# EAGLE board 0HP Vactrol LPG-VCA REV 1 (EAGLE 7.6.0)
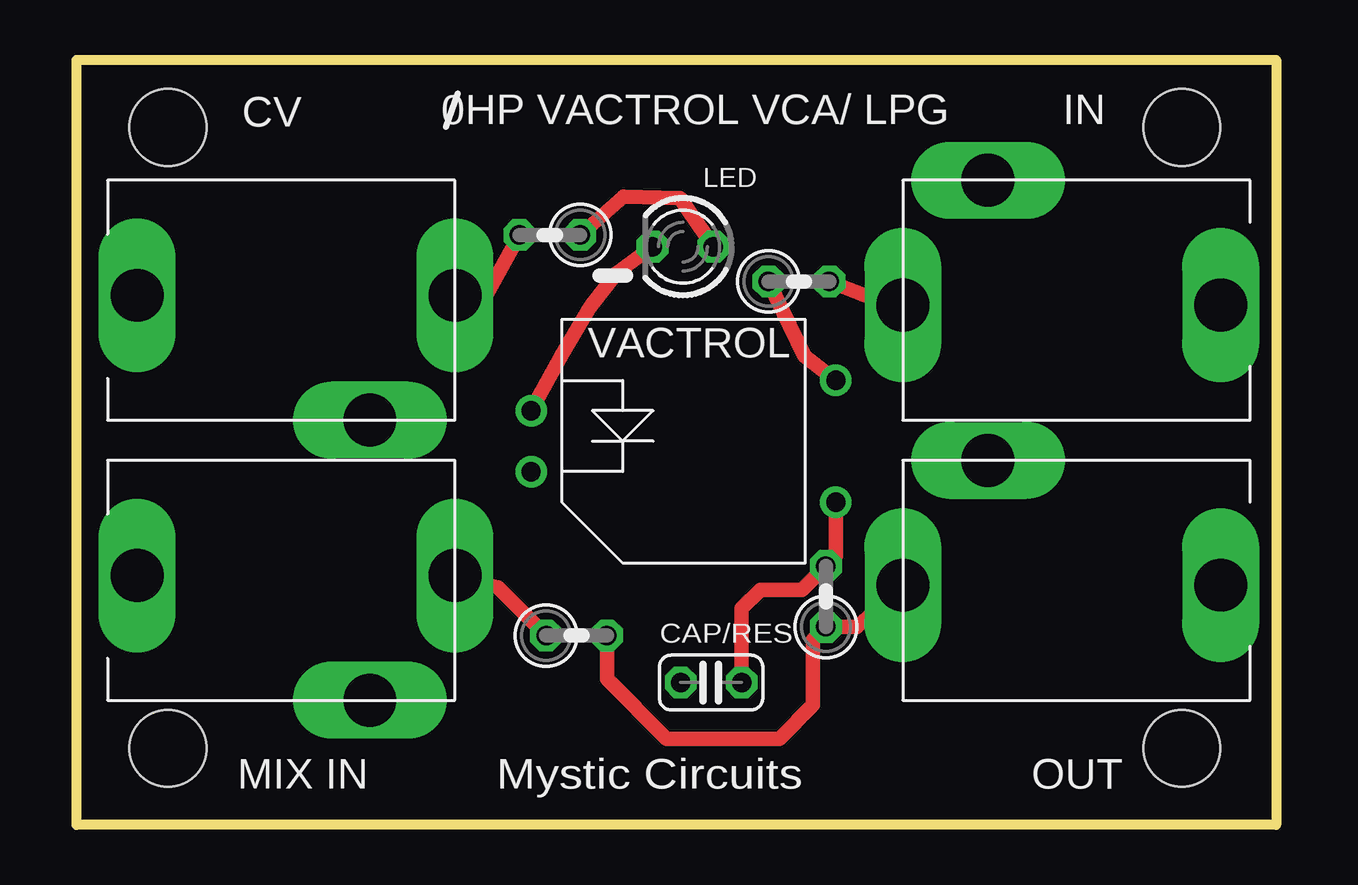
[diagram p0: board, top side]
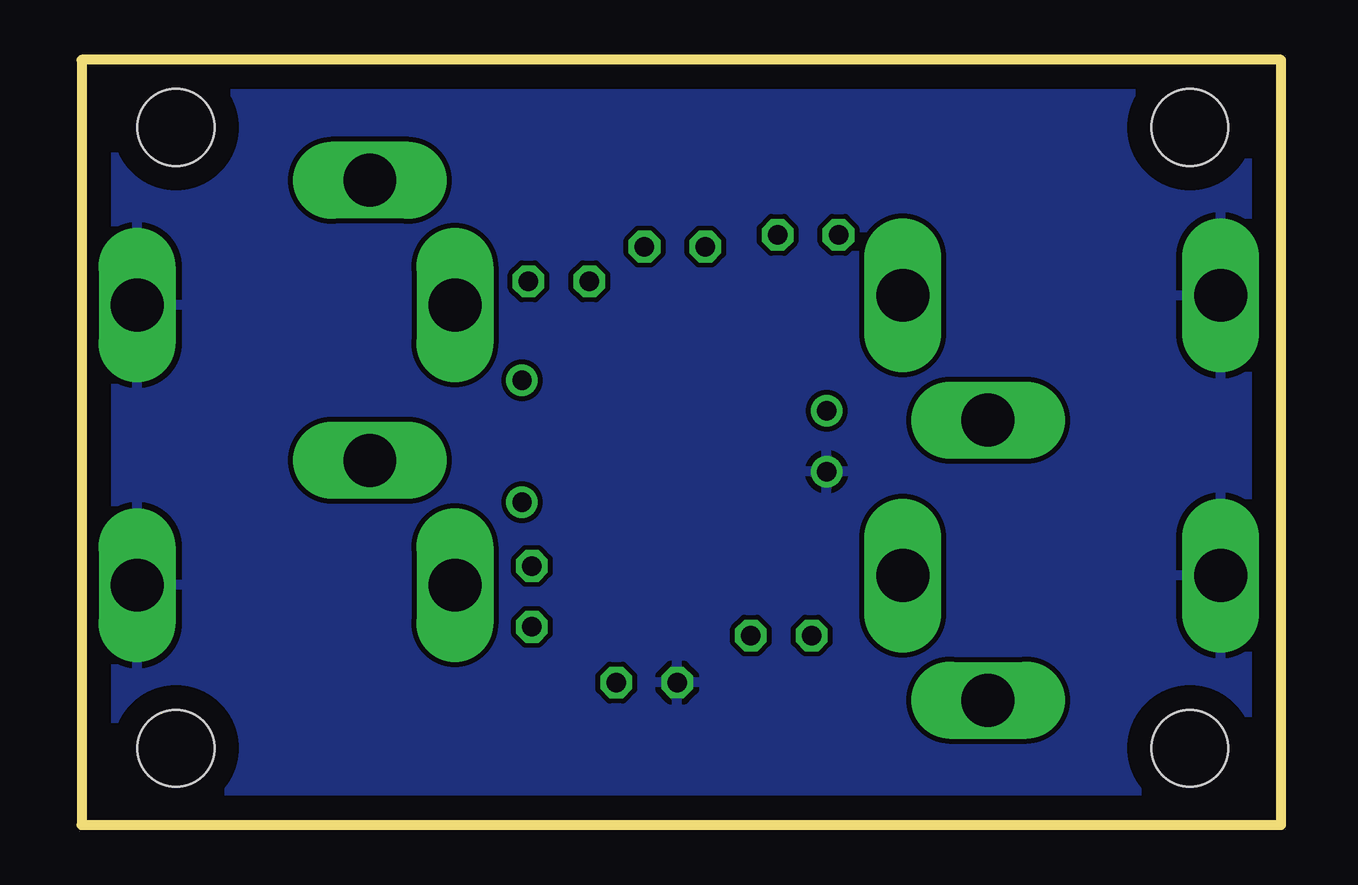
[diagram p1: board, bottom side, seen from below]

Size 50 x 31.89 mm. Coordinates in mm from the lower left corner, seen from the top.
Outline: 0,0 0,31.89 50,31.89 50,0 0,0
Copper layers (1*16): Top 0.035mm / dielectric 1.5mm / Bottom 0.035mm
Design rules "default": minimum track width 10mil, minimum drill 24mil, track to track 8mil, track to pad 8mil, pad to pad 8mil, via to via 8mil, smd to smd 8mil, copper to edge 40mil, drill to drill 8mil, minimum pad ring 10mil, minimum via ring 8mil, stop-mask expansion 4mil, vias tented up to drill 0mil, thermal gap 10mil
Holes 3.2 mm at 3.81,3.2 46.08,3.2 46.08,29.08 3.81,29.08

## Footprints (pad centres in the part's own frame; a part is rotated, then mirrored left to right if it is on the bottom)
C025-024X044 = drill 0.813 octagon: 1 -1.27,0; 2 1.27,0
3.5MMPHONEJACK = drill 2.2 pad 2.54 long: SLEEVE -5,0.2; SWITCH 4.7,-5; TIP 8.25,0.2
LED3MM = drill 0.813 octagon: A -1.27,0; K 1.27,0
0207/2V = drill 0.813 octagon: 1 -1.27,0; 2 1.27,0
VACTROL = drill 0.8: ANODE -6.35,1.27; BOTTOM 6.35,-2.54; CATHODE -6.35,-1.27; TOP 6.35,2.54

## Placement (x,y rotation side)
C1  10nF  [C025-024X044]  26.45,5.94 180 top
CV1  3.5MMJACK  [3.5MMPHONEJACK]  7.53,10.2 0 top
CV2  3.5MMJACK  [3.5MMPHONEJACK]  7.53,21.88 0 top
D1  [LED3MM]  25.27,24.11 180 top
IN  3.5MMJACK  [3.5MMPHONEJACK]  42.69,10.2 180 top
OUT  3.5MMJACK  [3.5MMPHONEJACK]  42.69,21.88 180 top
R1  1k  [0207/2V]  19.73,24.6 180 top
R2  10k  [0207/2V]  20.84,7.9 0 top
R3  1k  [0207/2V]  30.11,22.66 0 top
R5  1k  [0207/2V]  31.23,9.53 90 top
U$1  VACTROL  [VACTROL]  25.3,16 0 top

## Library data of the parts
C1 = rcl
CV1 CV2 IN OUT U$1 = elipech_modified
D1 = led
R1-R3 R5 = resistor

## Nets
GND: C1.2 CV1.SLEEVE CV2.SLEEVE IN.SLEEVE OUT.SLEEVE U$1.CATHODE
N$1: CV2.TIP R1.2
N$2: D1.A R1.1
N$3: CV1.TIP R2.1
N$4: C1.1 R5.2 U$1.BOTTOM
N$5: D1.K U$1.ANODE
N$7: R3.1 U$1.TOP
N$8: IN.TIP R2.2 R5.1
N$11: OUT.TIP R3.2

## Tracks (layer width: path | path; a pad name or v marks a point on that pad's centre or on a via)
GND
  pour Bottom: 0,0 0,31.62 50,31.62 50,0
N$1
  Top 0.61: CV2.TIP 16.98,21.93 R1.2
N$2
  Top 0.61: R1.1 22.8,26.2 25.16,26.14 D1.A
N$3
  Top 0.61: CV1.TIP 17.57,9.9 R2.1
N$4
  Top 0.61: U$1.BOTTOM 31.65,11.21 R5.2 30.23,9.8 28.5,9.8 27.72,9.02 C1.1
N$5
  Top 0.61: U$1.ANODE 20.25,19.65 21.4,21.6 22.52,23 D1.K
N$7
  Top 0.61: R3.1 30.34,19.55 U$1.TOP
N$8
  Top 0.61: IN.TIP 32.52,8.26 R5.1 30.7,7.72 30.7,5 29.3,3.6 24.6,3.6 22.11,6.09 R2.2
N$11
  Top 0.61: R3.2 32.77,22.12 OUT.TIP

## Text on the board
tPlace: CV | 0HP VACTROL VCA/ LPG | IN | LED | VACTROL | CAP/RES | MIX IN | Mystic Circuits | OUT